# Altium PCB seashell.PcbDoc
Units mil, origin at the board's own origin, x right, y up, seen from the top; angles counter-clockwise.
Board outline 1161.42 x 669.29 mil, 2 copper layers (Top Layer, Bottom Layer); 16 components, 17 nets, 85 pads, 29 vias.
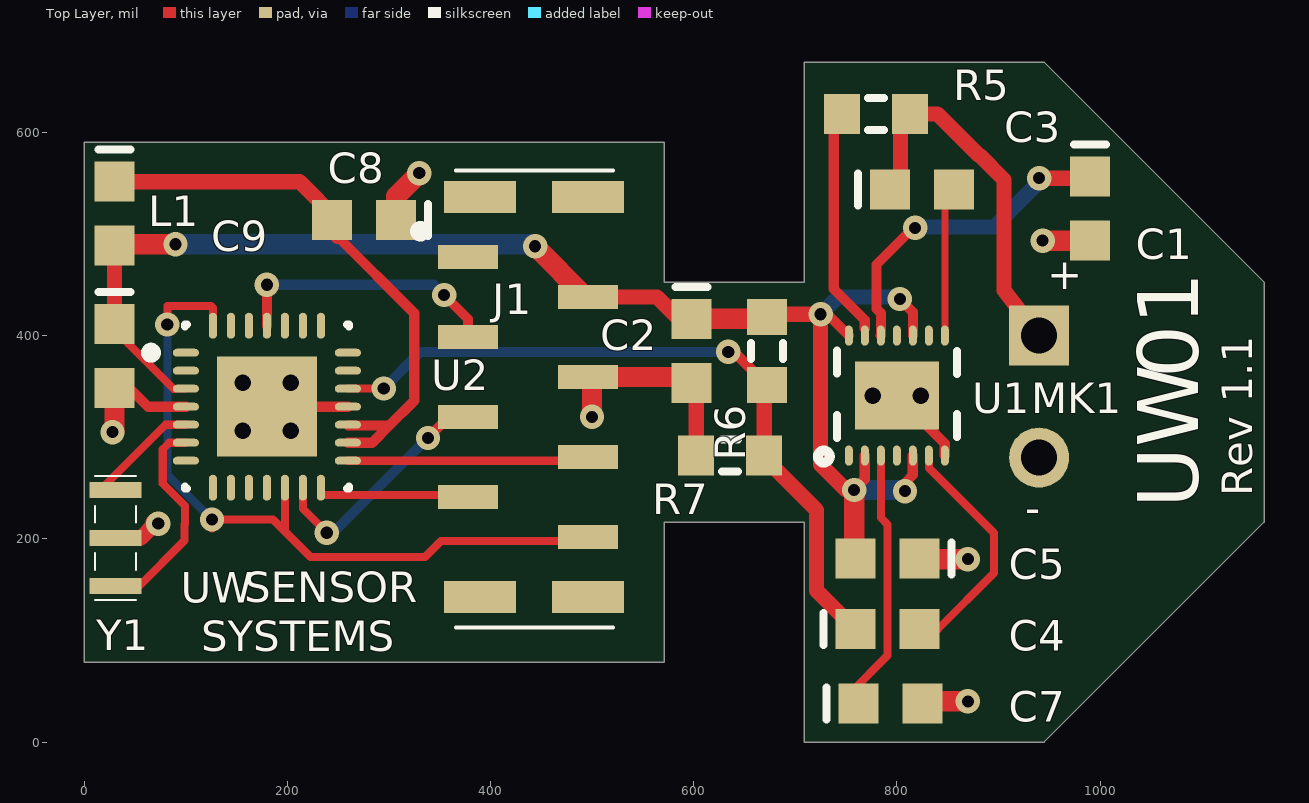
[diagram p0: Top Layer view]
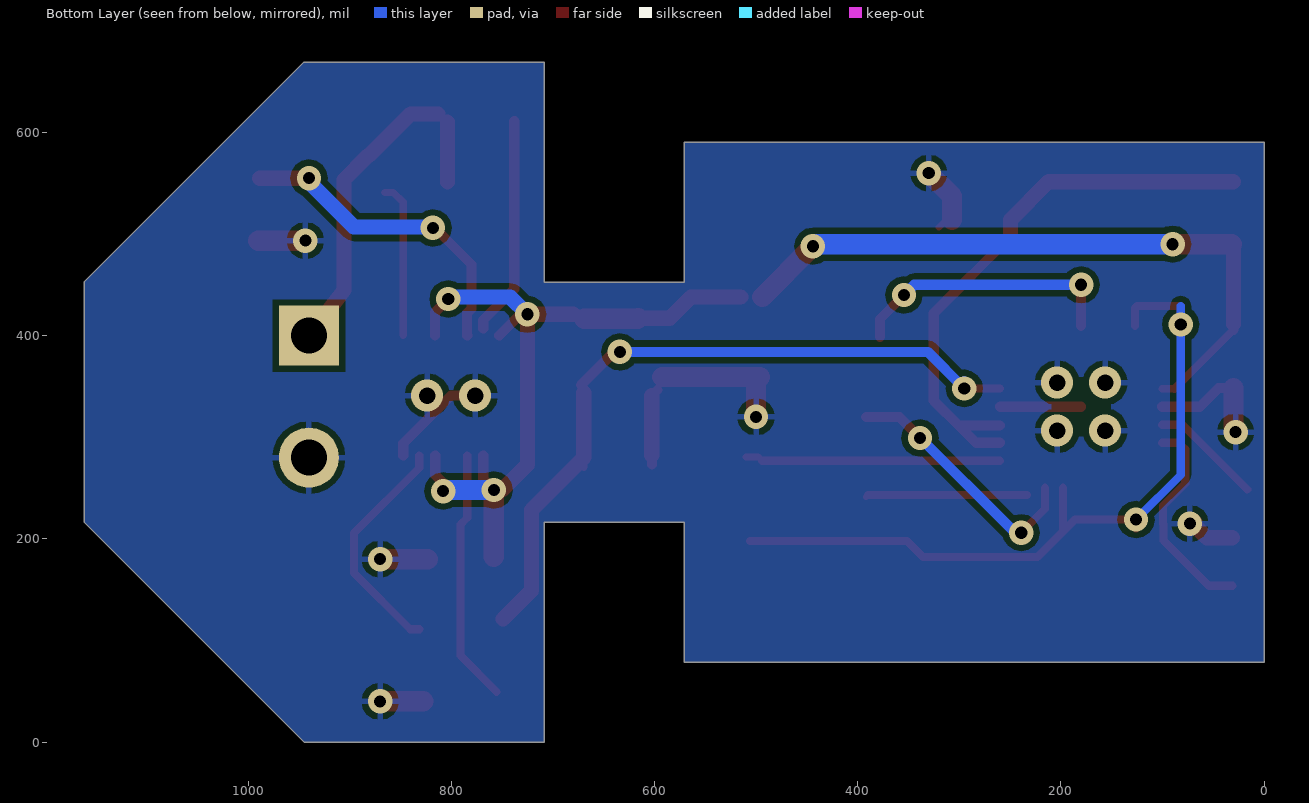
[diagram p1: Bottom Layer view, seen from below]

## Layer stack, top to bottom
Top Solder: solder mask 0.4, Solder Resist, Dk 3.5
Top Layer: signal copper 1.4
Dielectric1: dielectric 12.6, FR-4, Dk 4.8
Bottom Layer: signal copper 1.4
Bottom Solder: solder mask 0.4, Solder Resist, Dk 3.5

## Board outline
0,78.74 0,590.55 570.87,590.55 570.87,452.76 708.66,452.76 708.66,669.29 944.88,669.29 1161.42,452.76 1161.42,216.54 944.88,0 708.66,0 708.66,216.54 570.87,216.54 570.87,78.74 0,78.74

## Design rules (kind name [scope] priority, off if disabled: settings)
Clearance [All] p1: gap=6
DiffPairsRouting [All] p1: maxlimit=393.7 minlimit=4.92 mostfreqgap=5.91 toplayer_minwidth=15 toplayer_maxwidth=15 toplayer_prefwidth=15 bottomlayer_minwidth=15 bottomlayer_maxwidth=15 bottomlayer_prefwidth=15 maxuncoupledlength=500
FabricationTestPointUsage FabricationTestPointUsage_1 [All] p1: valid=0 allowmultiple=FALSE
FabricationTestpoint FabricationTestpoint_1 [All] p1: side=3 testpointundercomponent=TRUE minsize=40 maxsize=100 preferedsize=60 minholesize=0 maxholesize=40 preferedholesize=32 testpointgrid=1 allowsidetop=TRUE allowsidebottom=TRUE usegrid=TRUE gridtolerance=0.01
HoleSize [All] p1: absolutevalues=TRUE maxlimit=236.22 minlimit=7.87 maxpercent=80.000 minpercent=20.000
HoleSize FabricationTestpoint [All] p2 off: absolutevalues=TRUE maxlimit=100 minlimit=1 maxpercent=80.000 minpercent=20.000
HoleSize FabricationTestPointUsage [All] p3 off: absolutevalues=TRUE maxlimit=100 minlimit=1 maxpercent=80.000 minpercent=20.000
MinimumAnnularRing [All] p1: minimumring=6
MinimumSolderMaskSliver [All] p1: minsoldermaskwidth=4
PlaneClearance [All] p1: clearance=19.68
PlaneConnect [All] p1: planeconnectstyle=Relief reliefexpansion=15.75 reliefentries=4 reliefconductorwidth=5.91 reliefairgap=5.91
PolygonConnect [All] p1: connectstyle=Relief reliefconductorwidth=5.91 reliefentries=4 polygonreliefangle="90 Angle" airgapwidth=10
RoutingCorners [All] p1: cornerstyle=45-Degree minsetback=49.21 maxsetback=49.21
RoutingVias [All] p1: holewidth=11.81 width=23.62 viastyle="Through Hole" minholewidth=11.81 minwidth=17.72 maxholewidth=17.72 maxwidth=29.53
SilkToSilkClearance [All] p1: silktosilkclearance=6
SilkToSolderMaskClearance SilkscreenOverComponentPads [IsPad] p1: minsilkscreentomaskgap=6 clearancetoexposedcopper=TRUE
SolderMaskExpansion [All] p1: expansion=2.95
Width [All] p1: maxlimit=393.7 minlimit=6 preferedwidth=6 minimp=50.000000 maximp=50.000000 favimp=50.000000
19 further rules are at their usual default settings.

## Components (designator, comment, footprint, x,y, rotation, side; value= is the part's Value field where it differs from the comment)
C1 "C_bias" CAPC1608N 990,525 r270 top
C2 "Cap" CAPC1608N 598,385 r270 top
C3 "Cap" CAPC1608N 825,544 r0 top
C4 "Cout" CAPC1608N 791,111 r0 top
C5 "BypassCap" CAPC1608N 791,180.6 r180 top
C7 "Cap" CAPC1608N 794,38 r0 top
C8 "BypassCap" CAPC1608N 275.59,514 r180 top
C9 "Cap" CAPC1608N 30,380 r270 top
J1 "FFC 8-PIN Connector (1mm)" "Hirose FFC connector 8-Pin" 496.06,142.72 r90 top
L1 "Inductor" INDC1608N 30,520 r270 top
R5 "R_micbias" RESC1608N 779.53,618.11 r180 top
R6 "Rlevel" RESC1608N 672,385 r90 top
R7 "Rlevel" RESC1608N 636,282 r0 top
U1 "MAX9814" QFN-14-Minnimum-Solder-Mask-Relief 800,341 r0 top
U2 "ATmega168-28M1" 28M1 180,330 r0 top
Y1 "Ceramic Resonator SMT (w/ cap)" "AVX-PRQC Ceramic Resomator SMD" 31,201 r270 top

## Footprints (in the part's own frame and the unit in brackets; to place one, negate y for a bottom-side part, rotate by r counter-clockwise, add the part's x,y. Pads: shape width x height; smd on the part's side, far side on the other; paste and mask are expansions set on the pad)
28M1 [mm] "QFN, 28 Body 4.0x4.0mm, Pitch 0.45mm, IPC Medium Density"
  oval 0.65x0.2 smd mask+0.06: 1(-2.025,1.35) 2(-2.025,0.9) 3(-2.025,0.45) 4(-2.025,0) 5(-2.025,-0.45) 6(-2.025,-0.9) 7(-2.025,-1.35) 15(2.025,-1.35) 16(2.025,-0.9) 17(2.025,-0.45) 18(2.025,0) 19(2.025,0.45) 20(2.025,0.9) 21(2.025,1.35)
  oval 0.2x0.65 smd mask+0.06: 8(-1.35,-2.025) 9(-0.9,-2.025) 10(-0.45,-2.025) 11(0,-2.025) 12(0.45,-2.025) 13(0.9,-2.025) 14(1.35,-2.025) 22(1.35,2.025) 23(0.9,2.025) 24(0.45,2.025) 25(0,2.025) 26(-0.45,2.025) 27(-0.9,2.025) 28(-1.35,2.025)
  rect 2.5x2.5 smd: 29(0,0)
  silkscreen extent -3.02,-2.05 2.05,2.05, body extent -2.02,-2.02 2.02,2.02, height 1
"AVX-PRQC Ceramic Resomator SMD" [mm] "AVX-PRQC Ceramic Resomator SMD"
  rect 0.4x1.3 smd: 1(-1.2,0) 2(0,0) 3(1.2,0)
  silkscreen extent -1.55,-0.51 1.55,0.51
CAPC1608N [mm] "Chip Capacitor, Body 1.6x0.8mm, IPC Medium Density"
  rect 1x1 smd: 1(-0.8,0) 2(0.8,0)
  silkscreen extent -1.6,-0.4 -1.6,0.4, body extent -0.87,-0.48 0.87,0.48, height 0.85
"Hirose FFC connector 8-Pin" [mm] "Hirose FFC connector 8-Pin (FH12-8S-1SV)"
  rect 0.8x1.8 smd: 0(0,2.7) 0(0,0) 0(10,0) 0(10,2.7)
  rect 0.6x1.5 smd: 1(8.5,3) 2(7.5,0) 3(6.5,3) 4(5.5,0) 5(4.5,3) 6(3.5,0) 7(2.5,3) 8(1.5,0)
  silkscreen extent -0.76,-0.62 10.67,4.32
INDC1608N [mm] "Chip Inductor, Body 1.6x0.8mm, IPC Medium Density"
  rect 1x1 smd: 1(-0.8,0) 2(0.8,0)
  silkscreen extent -1.6,-0.4 -1.6,0.4, body extent -0.87,-0.48 0.87,0.48, height 0.71
QFN-14-Minnimum-Solder-Mask-Relief [mm]
  oval 0.2x0.5 smd mask+0.03: 1(-1.2,-1.5) 2(-0.8,-1.5) 3(-0.4,-1.5) 4(0,-1.5) 5(0.4,-1.5) 6(0.8,-1.5) 7(1.2,-1.5) 8(1.2,1.5) 9(0.8,1.5) 10(0.4,1.5) 11(0,1.5) 12(-0.4,1.5) 13(-0.8,1.5) 14(-1.2,1.5)
  rect 2.1x1.7 smd: 15(0,0)
  silkscreen extent -1.97,-1.67 1.5,1.12, body extent -1.55,-1.55 1.55,1.55, height 0.8
RESC1608N [mm] "Chip Resistor, Body 1.6x0.8mm, IPC Medium Density"
  rect 0.9x1 smd: 1(-0.85,0) 2(0.85,0)
  silkscreen extent -0.2,-0.4 0.2,0.4, body extent -0.85,-0.48 0.85,0.48, height 0.6

## Part data
C1 C4 C5 C8: library part Cap, "Capacitor"
C2 C3 C7 C9: "Capacitor"
J1: library part "FFC Connector-8Pin-SMT-1mm", "FFC 8-PIN Connector (1mm) (SMT)"
R5 R6 R7: library part Res2, "Resistor"
U1: "Microphone Amplifier with AGC and   Low-Noise Microphone Bias"
U2: "8-Bit AVR Microcontroller with 8K Bytes of In-System Programmable Flash Memory"
Y1: "TDK Ceramic Resonator 20MHz CCR20.0MXC7T"

## Free pads (board coordinates)
  rect 59.06x59.06 hole 35.43: 1(940,400)
  round 59.06 hole 35.43: 2(940,280)

## Via types
v1: diameter 24, hole 12, Top Layer to Bottom Layer, tented both sides, 23 vias
v2: diameter 31.5, hole 16.14, Top Layer to Bottom Layer, tented both sides, 6 vias

## Nets (pads, with @x,y where several pads share a name; then routed paths per layer and width w, separated by ;. In a path a pad name is that pad's centre, name@x,y a point inside that pad or via, vN(x,y) a via of type N, cw(c..) or ccw(c..) an arc to the next point about the centre after c; other vN are vias at no path point)
ADC0: C4.1 R6.1 R7.2 U2.19 | length 728.7
  Top Layer w7: R7.2@669.47,270.47 669.47,280 R7.2
  Top Layer w8: U2.19@260.01,348 v1(295,348)
  Top Layer w10: v1(634,384) 639.54,384 R6.1
  Top Layer w15: R7.2@669.47,280 721,228.47 721,149 C4.1@749,121 ; R7.2 R6.1@669.47,344
  Bottom Layer w7: v1(295,348) v1@295,357
  Bottom Layer w10: v1(295,348) 331,384 v1(634,384) 638,384 640,382 v1@635,377
AREF: C8.2 L1.1 U2.16 U2.17 | length 567.5
  Top Layer w10: C8.2@249.5,497.5 325,422 325,336 300.5,311.5 ; U2.16 283.57,294.57 300.5,311.5 ; U2.17@259.72,311.5 300.5,311.5
  Top Layer w15: L1.1 212.01,551.5 249.5,514 C8.2@249.5,497.5
CS: J1.8 U2.12 U2.28 | length 782.3
  Top Layer w8: v1(82,411) 82,429 125,429 126.85,427.15 U2.28 ; v1@127,211 126,210 v1(126,219) 186,219 197,208 ; U2.12 197.72,208.72 197,208 ; J1.8@506.07,198 351.5,198 335.5,182 223,182 197,208
  Bottom Layer w8: v1(82,411) 82,429 82,263 v1(126,219)
GND: C1.2 C2.2 C5.1 C7.2 C8.1 C9.2 J1.4 pad.2 R7.1 U1.7 U1.15 U2.4 U2.18 U2.29 Y1.2 | length 765.9
  Top Layer w6.3: C8.1@315.5,511 C8.1@320,506.5 ; J1.4@504.09,365 J1.4@509.84,359.25
  Top Layer w10: C9.2 44.5,348.5 63,330 U2.4 ; U2.29 U2.18 ; C2.2@597,346.5 C2.2@602.54,340.97 ; R7.1@602.54,273.46 R7.1 ; v2(776.38,341) U1.15 847.24,293.76 U1.7
  Top Layer w15: Y1.2 56,201 v1@70,215 ; R7.1 C2.2@602.54,340.97
  Top Layer w20: v1@30,305 C9.2 ; v1@70,215 v1(73,215) ; C8.1 307.09,537.09 v1(330,560) ; J1.4 509.84,359.25 C2.2@592.25,359.25 ; v1(500,320) J1.4@500,355.31 ; C5.1@823.09,180 v1(870,180) ; C7.2@827.49,40 v1(870,40) ; v1(943.5,493.5) C1.2
  Bottom Layer w20: v1@73,213 v1(73,215)
  other v1: 28,305
  other v2: 156.38,306.38 203.62,306.38 823.62,341 156.38,353.62 203.62,353.62
MICBIAS: R5.2 U1.13 | length 216.9
  Top Layer w10: R5.2@738,611.22 738,445.85 768.5,415.34 U1.13@768.5,406.93
MISO: J1.7 U2.14 | length 159.4
  Top Layer w6.3: J1.7@389.72,243.15 J1.7@391.73,241.14
  Top Layer w8: U2.14@233.15,243.15 J1.7@389.72,243.15
MOSI: J1.5 U2.13 | length 247.9
  Top Layer w8: U2.13 215.43,229.57 v1(239,206)
  Top Layer w10: v1@343,304 358.88,319.88 J1.5@391.73,319.88
  Bottom Layer w10: v1@245,206 v1@343,304
  other v1: 338.58,299.21
NetC1_1: C1.1 U1.12 | length 318.7
  Top Layer w7: v1@816,506 v1(818,506)
  Top Layer w10: U1.12 784.5,400.31 784.5,421.97 780,426.47 780,470 v1@816,506
  Top Layer w15: v1(940,555) C1.1@988.5,555
  Bottom Layer w10: v1@940,551 v1(940,555)
  Bottom Layer w15: v1@816.89,506.89 895.89,506.89 v1@940,551
NetC3_1: C3.1 pad.1 R5.1 | length 343.6
  Top Layer w15: C3.1@803.55,551.18 R5.1@803.55,610.24 ; R5.1 839.89,618.11 880.81,577.19 881.77,577.19 905.51,553.45 905.51,444.49 pad.1
NetC3_2: C3.2 U1.8 | length 153.5
  Top Layer w7: U1.8 847.24,531.24 857,541 C3.2@865.5,541
NetC4_2: C4.2 U1.6 | length 229.4
  Top Layer w8: C4.2@831.4,111 840.33,111 895.67,166.34 895.67,205.71 831.5,269.88 U1.6
NetC7_1: C7.1 U1.3 | length 249.9
  Top Layer w8: C7.1@755.5,49.5 791,85 791,214 784.25,220.75 U1.3
NetU2_5: U2.5 Y1.1 | length 110.2
  Top Layer w8: Y1.1@16.5,248.5 80.28,312.28 U2.5
NetU2_6: U2.6 Y1.3 | length 210.9
  Top Layer w8: Y1.3 54.34,153.75 99,198.41 99,214.11 99.41,214.52 99.41,232.59 77.48,254.52 77.48,288.11 83.94,294.57 U2.6
RESET_PROGRAMMER: J1.3 U2.25 | length 269.9
  Top Layer w10: U2.25 v1(180,450) ; v1(354.37,440) 377.95,416.42 J1.3
  Bottom Layer w10: v1(180,450) 344.37,450 v1(354.37,440)
SCK: J1.6 U2.15 | length 251.4
  Top Layer w7: J1.6@494,277 497.51,280.51 J1.6@509.84,280.51
  Top Layer w8: U2.15@259.72,276.85 J1.6@493.85,276.85
VCC: C2.1 C5.2 C9.1 J1.2 L1.2 R6.2 U1.2 U1.5 U1.10 U1.14 U2.3 | length 1426.2
  Top Layer w7: U2.3@88.01,347.72 U2.3
  Top Layer w8: C9.1@30,405.73 U2.3@88.01,347.72
  Top Layer w10: C9.1@30,405.73 C9.1 ; v1(725,421) 731.81,421 U1.14 ; v1(758,248) 768.5,258.5 U1.2 ; v1(803,436) 815.94,423.06 U1.10@815.94,400.25 ; v1(808,247) 808,255 815.75,262.75 U1.5 ; R6.2@665.47,420 R6.2 672,413.47 668.97,416.5 R6.2@665.47,420
  Top Layer w15: C9.1 L1.2 ; J1.2@515,438 564,438 585,417 C2.1@616,417 ; R6.2@679.53,421 v1(725,421) 725,273 v1@750,248
  Top Layer w20: L1.2@31.5,490 v1(90,490) ; v1(444,488) J1.2@494.01,437.99 ; C2.1@616,417 616.5,416.5 R6.2@668.97,416.5 ; C5.2@758,182.1 v1(758,248)
  Bottom Layer w10: v1(803,436) v1@804.99,437.99
  Bottom Layer w15: v1(725,421) 742,438 v1@801,438
  Bottom Layer w20: v1(90,490) v1@442,490 ; v1@724.53,421 v1(725,421) ; v1(758,248) v1@807,248
pads on no net: J1.0 J1.1 U1.1 U1.4 U1.9 U1.11 U2.1 U2.2 U2.7 U2.8 U2.9 U2.10 U2.11 U2.20 U2.21 U2.22 U2.23 U2.24 U2.26 U2.27

## Polygon pours and split planes (outlines as drawn)
GND on Bottom Layer "Bottom Layer-No Net" (solid, pour order 5): 0,590.55 570.87,590.55 570.87,452.76 708.66,452.76 708.66,669.29 944.88,669.29 1161.42,452.76 1161.42,216.54 944.88,0 708.66,0 708.66,216.54 570.87,216.54 570.87,78.74 0,78.74

## Silkscreen, mask and mechanical layers (free items; w line width, h text height)
Top Overlay:
  text "+" at 947.83,445.87 h30
  text "01" at 1096.46,358.27 h60 r90
  text "MK1" at 932.09,323.82 h30
  text "Rev 1.1" at 1149.61,242.13 h30 r90
  text "UW" at 1096.46,230.31 h60 r90
  text "-" at 926.18,215.55 h30
  text "SENSOR" at 157.48,137.8 h30
  text "UW" at 95,137 h30
  text "SYSTEMS" at 115.16,89.57 h30
Mechanical 1:
  lines w3.94: 212.6,567.91 527.56,567.91
  lines w10: 69.85,472.44 cw(c164.86,472.9) 164.37,567.91 211.61,567.91 ; 70.87,472.44 212.6,472.44 212.6,566.93 ; 210.6,99.41 164.37,99.41 cw(c163.91,194.42) 68.9,193.93 210.63,193.93 210.63,99.44